# Altium PCB miaow-foc-board.pcbdoc (part 4 of 10)
Units mil, origin at the board's own origin, x right, y up, seen from the top; angles counter-clockwise.
Board outline 2755.91 x 3149.61 mil, 6 copper layers (SIG1, GND2, SIG3, PWR4, GND5, SIG6), stack 60.566 mil thick; 437 components, 392 nets, 2120 pads, 1697 vias.
Unrouted connection lines stored in the file: 1090.
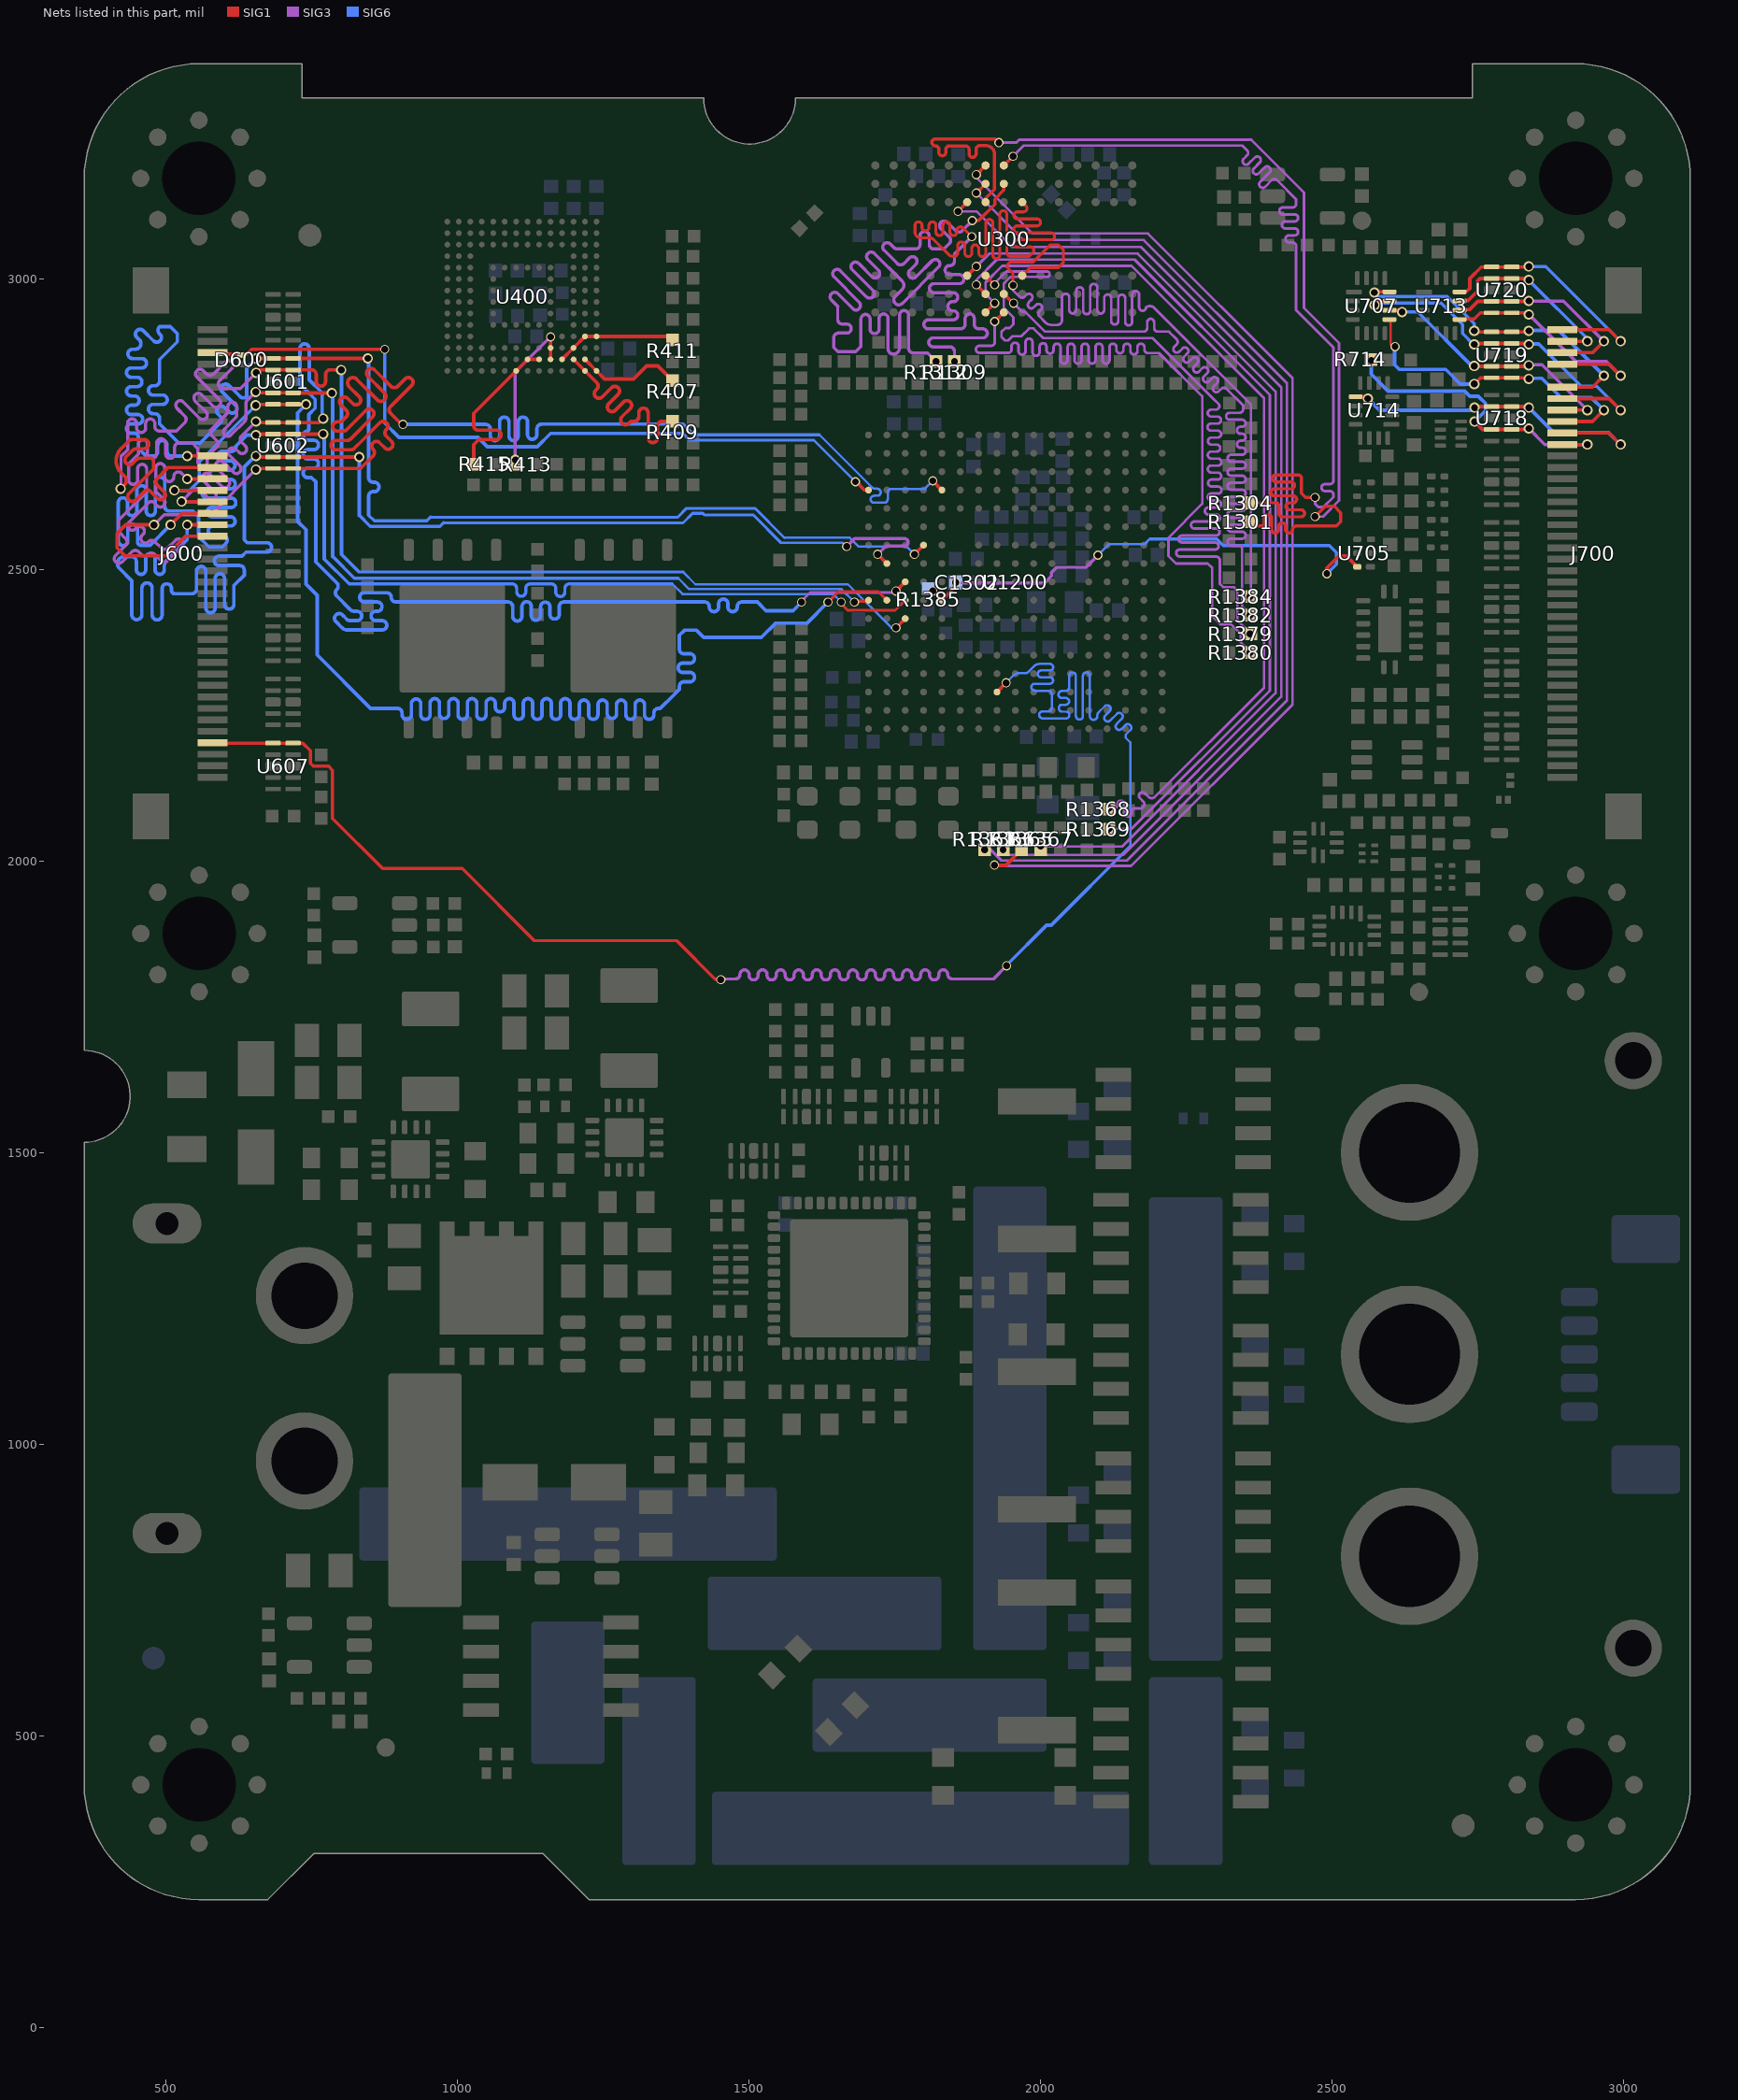
[diagram p7: the nets of this part, all layers, seen from the top]

## Via types
v1: diameter 17.72, hole 11.81, SIG1 to SIG6, tented both sides, 1223 vias
v2: diameter 15.75, hole 11.81, SIG1 to SIG6, tented both sides, 453 vias
v3: diameter 17.72, hole 11.81, SIG1 to SIG6, tented top, 21 vias

## Nets (pads, with @x,y where several pads share a name; then routed paths per layer and width w, separated by ;. In a path a pad name is that pad's centre, name@x,y a point inside that pad or via, vN(x,y) a via of type N, cw(c..) or ccw(c..) an arc to the next point about the centre after c; other vN are vias at no path point) (continued)
_30: J700.30 R714.1 U718.2 U718.9 | length 533.6
  SIG1 w6: v1@2748.41,2754.58 2748.41,2751.21 2758.43,2741.19 U718.9@2774.38,2741.19 U718.2@2808.83,2741.19 2836.41,2741.19 v1(2838.16,2742.94) ; J700.30@2895.49,2715.39 v1@2938.59,2715.39
  SIG3 w5.5: v1(2838.16,2742.94) 2865.72,2715.38 v1(2938.59,2715.38)
  SIG6 w6: v2@2567.71,2860.8 2567.71,2836.2 2596.8,2807.11 2728.3,2807.11 2737.02,2798.39 2751.44,2798.39 2763.81,2786.02 2763.81,2773.34 v1(2745.04,2754.58)
  other v2: 2567.71,2859.8
_31: J700.31 U714.9 U718.4 U718.7 | length 599.8
  SIG1 w6: U714.9@2541,2797.3 2558.95,2797.3 v1(2561.99,2794.26) ; v1@2746.79,2780.56 U718.7@2774.38,2780.56 U718.4@2808.83,2780.56 2836.41,2780.56 v1(2838.16,2778.82) ; J700.31@2895.33,2735.21 2975.69,2735.21 v1(2995.53,2715.38)
  SIG6 w6: v1(2561.99,2794.26) 2582.21,2774.04 2740.26,2774.04 v1(2745.04,2778.82) ; v1(2838.16,2778.82) 2881.36,2735.62 2975.1,2735.62 2995.34,2715.38 v1(2995.53,2715.38)
_32: J700.32 U707.9 U719.1 U719.10 | length 562.3
  SIG1 w4: U707.9@2599.07,2930.01 2601.07,2928.01 2601.07,2887.13 2604.47,2883.73 2604.59,2883.86 v2@2607.48,2883.86
  SIG1 w6: v1(2744.57,2819.25) 2755.21,2829.89 U719.10@2774.38,2829.89 U719.1@2808.83,2829.89 2836.41,2829.89 v1(2838.16,2828.14) ; J700.32@2895.33,2754.9 2947.53,2754.9 v1(2967.06,2774.43)
  SIG6 w6: v2@2607.77,2882.49 2607.77,2852.43 2615.98,2844.22 2695.53,2844.22 2720.49,2819.25 v1(2744.57,2819.25) ; v1@2838.16,2829.14 2860.46,2829.14 2893.7,2795.9 2945.59,2795.9 v1(2967.06,2774.43)
  other v2: 2608.77,2883.42
_33: J700.33 U707.10 U719.2 U719.9 | length 456.2
  SIG1 w6: U707.10@2599.07,2945.76 2617.9,2945.76 2620.7,2942.97 v1(2620.7,2942.76) ; v1@2744.69,2849.61 U719.9@2774.34,2849.61 ; U719.9@2774.38,2849.57 U719.2@2808.83,2849.57 2836.41,2849.57 v1(2838.16,2851.32) ; J700.33@2895.49,2774.44 v1(2938.59,2774.43)
  SIG3 w5.5: v1@2838.16,2852.32 2860.71,2852.32 v1(2938.59,2774.43)
  SIG6 w6: v1(2620.7,2942.76) 2620.7,2942.97 2647.67,2942.97 2741.03,2849.61 v1@2745.04,2849.61
  other v1: 2744.57,2850.11
_34: J700.34 U707.11 U719.4 U719.7 | length 646.8
  SIG1 w6: v1(2573.55,2954.89) 2580.16,2961.51 U707.11@2599.07,2961.51 ; v1(2744.57,2887.2) 2746.32,2888.94 U719.7@2774.38,2888.94 U719.4@2808.83,2888.94 2836.41,2888.94 v1(2838.16,2887.2) ; J700.34@2895.33,2794.27 2975.69,2794.27 v1(2995.53,2774.43)
  SIG6 w5.5: v1(2573.55,2954.89) 2576.77,2958.11 2687.56,2958.11 2724.52,2921.15 2724.52,2905.92 2743.25,2887.2 v1(2744.57,2887.2)
  SIG6 w6: v1@2838.16,2888.2 2855.23,2888.2 2928.08,2815.35 2954.7,2815.35 v1@2995.53,2774.52
_35: J700.35 U707.12 U719.5 U719.6 | length 565.7
  SIG1 w6: v1(2573.07,2976.21) 2574.11,2977.25 U707.12@2599.07,2977.25 ; v1@2746.79,2908.63 U719.6@2774.38,2908.63 U719.5@2808.83,2908.63 2836.41,2908.63 v1(2838.16,2910.38) ; J700.35@2895.33,2813.95 2947.53,2813.95 v1(2967.06,2833.49)
  SIG6 w5.5: v1(2573.07,2976.21) 2579.72,2969.56 2698.13,2969.56 2744.57,2923.11 v1(2744.57,2910.38)
  SIG6 w6: v1@2838.16,2911.38 2889.17,2911.38 v1(2967.06,2833.49)
_37: J700.37 U713.9 U720.1 U720.10 | length 433.6
  SIG1 w6: U713.9@2719.37,2930.01 2720.37,2931.01 2744.7,2931.01 2754.96,2941.27 U720.10@2774.38,2941.27 U720.1@2808.83,2941.27 2836.01,2941.27 v1@2838.16,2939.12 ; J700.37@2895.33,2853.32 2975.69,2853.32 v1(2995.53,2833.49)
  SIG3 w5.5: v1(2838.16,2938.52) 2918.38,2858.3 2970.71,2858.3 v1(2995.53,2833.49)
_38: J700.38 U713.10 U720.2 U720.9 | length 362.8
  SIG1 w6: U713.10@2719.37,2945.76 2720.37,2946.76 2736.24,2946.76 2750.44,2960.95 U720.9@2774.38,2960.95 U720.2@2808.83,2960.95 2836.01,2960.95 2836.75,2961.7 v1(2838.16,2961.7) ; J700.38@2895.33,2873.01 2947.53,2873.01 v1(2967.06,2892.54)
  SIG3 w5.5: v1(2838.16,2961.7) 2897.9,2961.7 v1(2967.06,2892.54)
_39: J700.39 U713.11 U720.4 U720.7 | length 335.7
  SIG1 w6: U713.11@2719.37,2961.51 2720.37,2962.51 2733.98,2962.51 2750.14,2978.67 2750.14,2996.09 2754.38,3000.32 U720.7@2774.38,3000.32 U720.4@2808.83,3000.32 2836.01,3000.32 v1@2838.16,2998.17 ; J700.39@2895.49,2892.55 v1(2938.59,2892.54)
  SIG6 w6: v1(2838.16,2997.58) 2938.59,2897.15 v1(2938.59,2892.54)
_40: J700.40 U713.12 U720.5 U720.6 | length 465.7
  SIG1 w6: U713.12@2719.37,2977.25 2720.37,2978.25 2731.84,2978.25 2736.77,2983.19 2736.77,3000.21 2756.57,3020.01 U720.6@2774.38,3020.01 U720.5@2808.83,3020.01 2836.01,3020.01 2836.75,3020.76 v1(2838.16,3020.76) ; J700.40@2895.33,2912.38 2975.69,2912.38 v1(2995.53,2892.54)
  SIG6 w6: v1(2838.16,3020.76) 2867.32,3020.76 v1(2995.53,2892.54)
_D3: R407.2 U400.A1 U400.B2 | length 183.5
  SIG1 w6: U400.B2@1218.62,2861.5 U400.A1@1238.3,2841.82 1252.27,2827.85 1301.83,2827.85 1324.33,2850.36 1343.47,2850.36 R407.2@1368.5,2825.33
_D4: R409.2 U400.A2 U400.B3 | length 455.2
  SIG1 w6: U400.B3@1199.68,2860.74 1225.42,2834.99 1238.85,2821.56 cw(c1233.2,2815.9) 1238.85,2810.24 1237.03,2808.42 ccw(c1242.69,2802.76) 1237.03,2797.11 ccw(c1242.69,2802.76) 1248.35,2797.11 1264.2,2812.96 cw(c1269.86,2807.31) 1275.51,2801.65 1259.28,2785.42 ccw(c1264.95,2779.77) 1270.6,2774.11 1284.94,2788.45 cw(c1290.61,2782.8) 1296.26,2777.14 1282.34,2763.23 ccw(c1288.05,2757.52) 1294.66,2752.87 cw(c1300.24,2747.29) 1299.98,2755.18 cw(c1300.24,2747.29) 1300.24,2755.18 1302.98,2755.18 ccw(c1302.98,2763.18) 1310.98,2763.18 1310.98,2769.84 cw(c1318.98,2769.84) 1326.98,2769.84 1326.98,2726.69 ccw(c1334.98,2726.69) 1342.98,2726.69 1342.98,2747.18 cw(c1350.98,2747.18) 1350.98,2755.18 R409.2@1368.36,2755.18
_D5: R411.2 U400.B4 U400.C3 U400.D1 U400.D2 | length 207.3
  SIG1 w6: U400.B4@1179.25,2861.5 U400.C3@1198.93,2881.19 U400.D2@1218.62,2900.87 1364.22,2900.87 R411.2@1368.5,2896.6
_D6: R413.2 U400.B5 U400.C5 | length 275.2
  SIG1 w5.5: v2@1159.56,2899.97 v2(1159.72,2900.13)
  SIG1 w6: U400.B5@1159.56,2861.5 U400.C5@1159.56,2881.19 v2@1159.56,2899.97
  SIG3 w5.5: v1(1099.21,2689.05) 1098.77,2689.49 1098.77,2839.18 v2(1159.72,2900.13)
_D7: R415.2 U400.A8 U400.B6 U400.B7 | length 316.1
  SIG1 w6: R415.2@1027.58,2681.61 1027.58,2715.18 1036.48,2724.08 1066.4,2724.08 ccw(c1066.4,2732.08) 1066.4,2740.08 1035.58,2740.08 cw(c1035.58,2748.08) 1027.58,2748.08 1027.58,2768.89 U400.A8@1100.51,2841.82 U400.B7@1120.19,2861.5 U400.B6@1139.88,2861.5
A0: R1363.2 U300.G8 | length 1874.6
  SIG1 w6: v2(1890.13,3146.94) U300.G8@1905.88,3162.69
  SIG3 w4.5: v2(1890.13,3146.94) 1970.83,3066.24 2177.48,3066.24 2422.98,2820.74 2422.98,2276.2 2148.56,2001.78 1933.16,2001.78 1914.82,2020.13 v1(1904.42,2020.13)
A1: R1365.2 U300.G9 | length 1959.8
  SIG1 w6: v2(1890.13,3178.43) U300.G9@1905.88,3194.18 ; v2@1919.88,1994.12 1924.69,1994.12 1925.68,1993.13 1940.69,1993.13 R1365.2@1967.68,2020.13
  SIG3 w4.5: v2(1890.13,3178.43) 1890.13,3173.71 1986.37,3077.47 2184.65,3077.47 2432.61,2829.51 2432.61,2269.37 2155.63,1992.39 1926.42,1992.39 1925.68,1993.13 1924.69,1994.12 v2@1919.88,1994.12
  other v2: 1921.33,1993.94
A2: R1366.2 U300.F7 | length 1826.3
  SIG1 w6: v2(1858.64,3115.44) U300.F7@1874.38,3131.19
  SIG3 w4.5: v2(1858.64,3115.44) 1890.46,3115.44 1951.66,3054.24 2173.01,3054.24 2413.34,2813.9 2413.34,2282.81 2141.92,2011.38 1944.79,2011.38 v1(1936.05,2020.13)
A3: R1367.2 U300.F3 | length 1662.5
  SIG1 w5.5: v2@1893.37,3024.19 v2@1893.86,3024.19
  SIG1 w6: U300.F3@1874.38,3005.21 v2(1890.13,3020.95)
  SIG3 w4.5: v2@1893.86,3024.19 1894.03,3024.36 1894.03,3024.73 1912.31,3043.01 2166.86,3043.01 2403.71,2806.16 2403.71,2289 2140.56,2025.85 v1@2006.04,2025.85
  other v1: 2000.32,2026.63
A4: R1368.2 U300.G1 | length 1566.7
  SIG1 w6: U300.G1@1905.88,2942.21 v2(1921.63,2957.96)
  SIG3 w4.5: v2(1921.63,2957.96) 1905.88,2973.71 1905.88,2993.51 1934.35,3021.98 2156.69,3021.98 2383.73,2794.94 2383.73,2298.06 2196.78,2111.1 cw(c2191.08,2116.8) 2185.38,2111.1 2179.34,2117.13 ccw(c2175.1,2112.89) 2170.86,2117.13 ccw(c2175.1,2112.89) 2170.86,2108.65 2176.89,2102.61 cw(c2172.65,2098.37) 2176.89,2094.13 2174.06,2091.3 2162.45,2091.3 ccw(c2162.45,2085.3) 2156.45,2085.3 2156.45,2083.28 cw(c2150.45,2083.28) 2144.45,2083.28 2144.45,2098.44 ccw(c2138.45,2098.44) 2132.45,2098.44 2132.45,2097.3 cw(c2126.45,2097.3) 2126.45,2091.3 v1(2117.49,2091.3)
A5: R1369.2 U300.G2 | length 1527.7
  SIG1 w5.5: U300.G2@1905.88,2972.59 U300.G2@1905.88,2973.71
  SIG1 w6: v2(1890.13,2989.46) U300.G2@1905.88,2973.71
  SIG3 w4.5: v2(1890.13,2989.46) 1890.13,2997.61 1925.32,3032.8 2161.64,3032.8 2393.69,2800.74 2393.69,2293.14 2156.8,2056.25 v1(2117.49,2056.25)
A6: R1379.2 U300.G3 | length 1834.4
  SIG1 w6: U300.G3@1905.88,3005.21 v2(1921.63,2989.46)
  SIG3 w4.5: v2(1921.63,2989.46) 1921.63,2992.29 1941.51,3012.17 2011.61,3012.17 cw(c2011.61,3007.94) 2015.75,3007.08 cw(c2011.76,3007.08) 2011.76,3003.1 1949.08,3003.1 1948.01,3002.03 1947.49,3002.03 1939.51,2994.05 1939.51,2993.52 1937.22,2991.24 1937.22,2950.02 1953.52,2933.72 1953.52,2921.55 1947.48,2915.51 1940.22,2915.51 1933.31,2908.6 1933.31,2899.9 1939.1,2894.11 1945.07,2894.11 1952.23,2901.27 1967.4,2901.27 1980.86,2914.73 1988.11,2914.73 2004.72,2898.13 2192.85,2898.13 2298.68,2792.3 2305.44,2785.54 cw(c2301.2,2781.3) 2301.2,2775.3 2293.21,2775.3 ccw(c2293.21,2769.3) 2293.21,2763.3 2304.11,2763.3 cw(c2304.11,2757.3) 2304.11,2751.3 2292.88,2751.3 ccw(c2292.88,2745.3) 2292.88,2739.3 2304.28,2739.3 cw(c2304.28,2733.3) 2304.28,2727.3 2293.54,2727.3 ccw(c2293.54,2721.3) 2293.54,2715.3 2302.56,2715.3 cw(c2302.56,2709.3) 2302.56,2703.3 2293.31,2703.3 ccw(c2293.31,2697.3) 2293.31,2691.3 2304.77,2691.3 cw(c2304.77,2685.3) 2304.77,2679.3 2293.33,2679.3 ccw(c2293.33,2673.3) 2293.33,2667.3 2304.28,2667.3 cw(c2304.28,2661.3) 2304.28,2655.3 2293.85,2655.3 ccw(c2293.85,2649.3) 2293.85,2643.3 2304.93,2643.3 cw(c2304.93,2637.3) 2304.93,2631.3 2293.31,2631.3 ccw(c2293.31,2625.3) 2293.31,2619.3 2304.11,2619.3 cw(c2304.11,2613.3) 2304.11,2607.3 2288.35,2607.3 ccw(c2288.35,2601.3) 2288.35,2595.3 2302.22,2595.3 cw(c2302.22,2589.3) 2302.22,2583.3 2264.46,2583.3 ccw(c2264.46,2577.3) 2264.46,2571.3 2301.53,2571.3 cw(c2301.53,2565.3) 2301.53,2559.3 2243.15,2559.3 ccw(c2243.15,2553.3) 2243.15,2547.3 2300.01,2547.3 cw(c2300.01,2541.3) 2300.01,2535.3 2239.13,2535.3 ccw(c2239.13,2529.3) 2239.13,2523.3 2301.18,2523.3 cw(c2301.18,2516.25) 2308.23,2516.25 2308.23,2476.42 2313.78,2470.87 2331.74,2470.87 2337.94,2464.67 2337.94,2414.06 v2@2361.46,2390.55
  other v2: 2359.96,2390.55
A7: R1380.2 U300.H1 | length 1493.5
  SIG1 w6: v2(1921.63,2926.47) U300.H1@1937.38,2942.21
  SIG3 w4.5: v2(1921.63,2926.47) v2(1921.63,2926.47) 1921.68,2889.84 ; 1921.75,2890.76 cw(c1915.75,2890.76) 1915.75,2884.76 1895.4,2884.76 ccw(c1895.4,2878.73) 1895.4,2872.69 1944.92,2872.69 ccw(c1944.92,2878.38) 1950.61,2878.38 1950.61,2884.11 cw(c1956.61,2884.11) 1962.61,2884.11 1962.61,2875.63 ccw(c1968.61,2875.63) 1974.61,2875.63 1974.61,2891.1 cw(c1980.61,2891.1) 1986.61,2891.1 1986.61,2873.63 ccw(c1992.61,2873.63) 1998.61,2873.63 1998.61,2883.24 cw(c2004.61,2883.24) 2010.61,2883.24 2010.61,2877.32 ccw(c2016.61,2877.32) 2022.61,2877.32 2022.61,2882.35 cw(c2028.61,2882.35) 2034.61,2882.35 2034.61,2860.24 ccw(c2040.61,2860.24) 2046.61,2860.24 2046.61,2882.35 cw(c2052.61,2882.35) 2058.61,2882.35 2058.61,2860.24 ccw(c2064.61,2860.24) 2070.61,2860.24 2070.61,2882.35 cw(c2076.61,2882.35) 2082.61,2882.35 2082.61,2860.24 ccw(c2088.61,2860.24) 2094.61,2860.24 2094.61,2882.35 cw(c2100.61,2882.35) 2106.61,2882.35 2106.61,2860.24 ccw(c2112.61,2860.24) 2118.61,2860.24 2118.61,2882.35 cw(c2124.61,2882.35) 2130.61,2882.35 2130.61,2877.83 ccw(c2136.61,2877.83) 2142.61,2877.83 2142.61,2882.35 cw(c2148.61,2882.35) 2154.61,2882.35 2154.61,2876.09 ccw(c2160.61,2876.09) 2166.61,2876.09 2166.61,2882.35 cw(c2172.61,2882.35) 2178.61,2882.35 2178.61,2878.38 ccw(c2184.61,2878.38) 2184.61,2872.38 2203.45,2872.38 2277.83,2798 2277.83,2613.59 2219.71,2555.46 2219.71,2524.31 2232.81,2511.21 2287.39,2511.21 2294.83,2503.78 2294.83,2421.5 2309.32,2407.01 2327.47,2407.01 2344.1,2390.38 2344.1,2375.78 v2@2361.93,2357.95
  other v2: 2359.96,2358.42
A8: R1382.2 U300.H2 | length 1624.3
  SIG1 w5.5: v2@1953.12,2957.97 v2(1954.18,2957.97)
  SIG1 w6: U300.H2@1937.38,2973.71 v2@1953.12,2957.97
  SIG3 w4.5: v2(1954.18,2957.97) 1968.59,2943.55 1973.54,2943.55 2007.94,2909.15 2177.26,2909.15 ccw(c2177.26,2915.15) 2183.26,2915.15 2183.26,2925.08 cw(c2189.26,2925.08) 2195.26,2925.08 2195.26,2915.15 ccw(c2201.26,2915.15) 2201.26,2909.15 2220.64,2909.15 2233.97,2895.83 cw(c2229.73,2891.58) 2233.97,2887.34 ; v2@2361.94,2421.48 2346.08,2437.34 2346.08,2537.71 ccw(c2341.89,2537.71) 2341.89,2541.89 2327.24,2541.89 cw(c2327.24,2547.89) 2327.24,2553.89 2346.26,2553.89 ccw(c2346.26,2559.89) 2346.26,2565.89 2327.24,2565.89 cw(c2327.24,2571.89) 2327.24,2577.89 2346.26,2577.89 ccw(c2346.26,2583.89) 2346.26,2589.89 2327.24,2589.89 cw(c2327.24,2595.89) 2327.24,2601.89 2346.26,2601.89 ccw(c2346.26,2607.89) 2346.26,2613.89 2327.24,2613.89 cw(c2327.24,2619.89) 2327.24,2625.89 2346.26,2625.89 ccw(c2346.26,2631.89) 2346.26,2637.89 2327.24,2637.89 cw(c2327.24,2643.89) 2327.24,2649.89 2346.26,2649.89 ccw(c2346.26,2655.89) 2346.26,2661.89 2327.24,2661.89 cw(c2327.24,2667.89) 2327.24,2673.89 2346.26,2673.89 ccw(c2346.26,2679.89) 2346.26,2685.89 2327.24,2685.89 cw(c2327.24,2691.89) 2327.24,2697.89 2346.26,2697.89 ccw(c2346.26,2703.89) 2346.26,2709.89 2343.33,2709.89 cw(c2343.33,2715.89) 2343.33,2721.89 2346.26,2721.89 ccw(c2346.26,2727.89) 2346.26,2733.89 2343.33,2733.89 cw(c2343.33,2739.89) 2343.33,2745.89 2346.26,2745.89 ccw(c2346.26,2751.89) 2346.26,2757.89 2324.73,2757.89 cw(c2324.73,2763.89) 2324.73,2769.89 2341.89,2769.89 ccw(c2341.89,2775.89) 2347.89,2775.89 2347.89,2782.49 2319.41,2810.97 ccw(c2314.87,2806.44) 2310.34,2810.97 2306.27,2806.9 cw(c2302.02,2811.15) 2297.78,2815.39 ; 2229.9,2883.27 ccw(c2234.14,2879.03) 2238.38,2874.79 ; 2229.9,2883.27 2233.97,2887.34 ; 2229.9,2883.27 2233.97,2887.34 ; 2238.38,2874.78 2243.86,2880.26 ; 2238.38,2874.78 2243.86,2880.26 ; 2243.86,2880.26 cw(c2248.1,2876.02) 2252.34,2871.77 ; 2243.86,2880.26 cw(c2248.1,2876.02) 2252.34,2871.77 ; 2246.87,2866.3 ccw(c2251.11,2862.06) 2255.35,2857.81 ; 2246.87,2866.3 2252.34,2871.77 ; 2246.87,2866.3 2252.34,2871.77 ; 2255.35,2857.81 2260.83,2863.29 ; 2255.35,2857.81 2260.83,2863.29 ; 2260.83,2863.29 cw(c2265.07,2859.05) 2269.31,2854.8 ; 2260.83,2863.29 cw(c2265.07,2859.05) 2269.31,2854.8 ; 2264.31,2849.8 ccw(c2269.03,2845.09) 2264.31,2840.37 ccw(c2268.08,2844.14) 2271.85,2840.37 ; 2264.31,2849.8 2269.31,2854.8 ; 2264.31,2849.8 2269.31,2854.8 ; 2271.85,2840.37 2277.8,2846.32 ; 2271.85,2840.37 2277.8,2846.32 ; 2277.8,2846.32 cw(c2282.04,2842.07) 2286.28,2837.83 ; 2277.8,2846.32 cw(c2282.04,2842.07) 2286.28,2837.83 ; 2280.81,2832.36 ccw(c2285.05,2828.12) 2289.29,2823.87 ; 2280.81,2832.36 2286.28,2837.83 ; 2280.81,2832.36 2286.28,2837.83 ; 2289.29,2823.87 2294.77,2829.35 ; 2289.29,2823.87 2294.77,2829.35 ; 2294.77,2829.35 cw(c2299.01,2825.1) 2303.25,2820.86 ; 2294.77,2829.35 cw(c2299.01,2825.1) 2303.25,2820.86 ; 2297.78,2815.39 2303.25,2820.86 ; 2297.78,2815.39 2303.25,2820.86
  other v2: 2359.96,2422.67
A9: R1384.2 U300.J3 | length 1640.9
  SIG1 w5: v2(1953.13,2988.41) 1953.13,3009.03 1943.26,3018.89 1943.26,3023.63 1948.34,3028.71 1987.78,3028.71 2016.89,3057.82 2031.44,3057.82 2039.16,3050.09 2039.16,3026.92 2031.32,3019.08 1982.75,3019.08 U300.J3@1968.87,3005.21
  SIG3 w4.5: v2@1953.13,2984.91 1953.13,2980.39 1964.41,2969.11 ccw(c1968.65,2973.35) 1972.89,2969.11 1976.13,2972.34 cw(c1980.37,2968.1) 1984.62,2972.34 cw(c1980.37,2968.1) 1984.62,2963.86 1980.42,2959.66 ccw(c1984.93,2955.15) 1980.42,2950.64 ccw(c1984.4,2954.62) 1988.37,2950.64 1992.56,2954.83 cw(c1996.8,2950.58) 2001.04,2954.83 cw(c1996.8,2950.58) 2001.04,2946.34 1998.35,2943.65 ccw(c2002.59,2939.41) 1998.35,2935.16 2008.25,2925.26 ccw(c2019.62,2936.63) 2019.62,2920.56 2028.63,2920.56 ccw(c2028.63,2929.09) 2037.16,2929.09 2037.16,2967.91 cw(c2043.35,2967.88) 2049.54,2967.91 2049.54,2946.31 ccw(c2055.54,2946.31) 2061.54,2946.31 2061.54,2979.22 cw(c2067.54,2979.22) 2073.54,2979.22 2073.54,2945.06 ccw(c2079.54,2945.06) 2085.54,2945.06 2085.54,2985.06 cw(c2091.54,2985.06) 2097.54,2985.06 2097.54,2946.15 ccw(c2103.54,2946.15) 2109.54,2946.15 2109.54,2966.92 cw(c2115.54,2966.92) 2121.54,2966.92 2121.54,2927.39 ccw(c2127.54,2927.39) 2133.54,2927.39 2133.54,2966.47 cw(c2139.54,2966.47) 2145.54,2966.47 2145.54,2925.81 ccw(c2151.54,2925.81) 2157.54,2925.81 2157.54,2972.54 cw(c2163.54,2972.54) 2169.54,2972.54 2169.54,2950.84 ccw(c2175.54,2950.84) 2181.54,2950.84 cw(c2187.94,2942.92) 2195.13,2950.14 2361.46,2783.82 v2@2361.46,2454.8
  other v2: 2359.96,2454.8
A10: R1301.2 U300.G7 | length 1854.8
  SIG1 w5.5: U300.G7@1905.88,3131.19 1905.88,3137.56 1921.16,3152.85 1921.16,3213.88 ccw(c1906.9,3213.88) 1914.3,3226.07 ccw(c1906.9,3213.88) 1906.9,3228.14 1895.89,3228.14 ccw(c1895.89,3221.86) 1891.23,3226.07 ccw(c1895.89,3221.86) 1889.61,3221.86 1889.61,3214.09 cw(c1883.61,3214.09) 1877.61,3214.09 1877.61,3221.86 ccw(c1871.61,3221.86) 1871.61,3227.86 1843.79,3227.86 ccw(c1843.79,3221.86) 1837.79,3221.86 1837.79,3216.88 cw(c1831.79,3216.88) 1825.79,3216.88 1825.79,3221.86 ccw(c1819.79,3221.86) 1819.79,3227.86 cw(c1819.77,3233.71) 1819.92,3239.55 1922.68,3239.55 v2(1928.83,3233.4) ; R1301.2@2361.46,2583.31 2369.2,2575.57 2378.92,2575.57 ccw(c2378.92,2581.57) 2384.92,2581.57 2384.92,2588.88 cw(c2390.92,2588.88) 2396.92,2588.88 2396.92,2569.46 ccw(c2402.92,2569.46) 2408.92,2569.46 2408.92,2574.94 cw(c2414.92,2574.94) 2420.92,2574.94 2420.92,2569.46 ccw(c2426.92,2569.46) 2432.92,2569.46 2432.92,2569.57 cw(c2438.92,2569.57) 2438.92,2575.57 2508.35,2575.57 2515.41,2582.63 2515.41,2598.48 2504.61,2609.28 2488.9,2609.28 v2(2471.38,2591.75)
  SIG3 w4.5: v2(1928.83,3233.4) 1958.8,3233.4 1963.73,3238.34 2362.01,3238.34 2452.46,3147.88 2452.46,2949.72 2512.66,2889.52 2512.66,2619.18 2485.24,2591.75 v2(2471.38,2591.75)
A11: R1304.2 U300.H9 | length 1865.6
  SIG1 w5.5: R1304.2@2361.46,2615.44 2403.35,2615.44 cw(c2403.35,2609.44) 2409.35,2609.44 2409.35,2597.44 ccw(c2415.35,2597.44) 2415.35,2591.44 2447.34,2591.44 ccw(c2447.34,2597.44) 2447.34,2603.44 2427.35,2603.44 cw(c2427.35,2609.44) 2427.35,2615.44 2433.68,2615.44 ccw(c2433.68,2621.44) 2433.68,2627.44 2401.7,2627.44 cw(c2401.7,2633.44) 2401.7,2639.44 2430.21,2639.44 ccw(c2430.21,2645.44) 2436.21,2645.44 ccw(c2430.21,2645.44) 2430.21,2651.44 2404.06,2651.44 cw(c2404.06,2657.44) 2404.06,2663.44 2442.21,2663.44 cw(c2442.21,2657.44) 2448.21,2657.44 2448.21,2631.53 2455.05,2624.69 v2(2471.38,2624.69)
  SIG1 w6: U300.H9@1937.38,3194.18 v2(1953.12,3209.93)
  SIG3 w4.5: v2@1950.82,3207.63 1969.27,3226.07 1971.47,3228.28 2346.72,3228.28 2354.88,3220.12 cw(c2350.64,3215.87) 2354.88,3211.63 2348.94,3205.68 ccw(c2353.18,3201.44) 2357.42,3197.2 2368.07,3207.85 cw(c2372.32,3203.61) 2376.56,3199.36 2366.32,3189.13 ccw(c2370.56,3184.88) 2374.81,3180.64 2384.97,3190.8 cw(c2389.21,3186.56) 2393.45,3182.32 2377.29,3166.16 ccw(c2381.55,3161.93) 2385.78,3157.67 2397.31,3169.2 cw(c2401.55,3164.96) 2405.79,3169.2 2438.79,3136.2 2438.79,3128.19 cw(c2432.79,3128.19) 2432.79,3122.19 2416.2,3122.19 ccw(c2416.2,3116.19) 2416.2,3110.19 2436.23,3110.19 cw(c2436.23,3104.19) 2436.23,3098.19 2420.35,3098.19 ccw(c2420.35,3092.19) 2420.35,3086.19 2436.28,3086.19 cw(c2436.28,3080.19) 2436.28,3074.19 2426.6,3074.19 ccw(c2426.6,3068.19) 2426.6,3062.19 2432.79,3062.19 cw(c2432.79,3056.19) 2438.79,3056.19 2438.79,2946.1 2502.91,2881.99 2502.91,2653.49 cw(c2496.94,2653.49) 2496.94,2647.52 2488.41,2647.52 ccw(c2488.41,2641.52) 2488.41,2635.52 2496.94,2635.52 cw(c2496.94,2629.52) 2502.94,2629.52 2502.94,2625.28 2486.22,2608.56 2485.7,2608.04 2476.72,2608.04 2471.38,2613.38 v2(2471.38,2624.69)
B0: J600.12 U601.1 U601.10 U1200.D11 | length 2791.5
  SIG1 w6: v1@536.18,2695.84 J600.12@579.29,2695.84 ; v1(654.33,2862.73) 654.7,2863.1 U601.1@683.32,2863.1 U601.10@717.77,2863.1 844.58,2863.1 v1@845.97,2864.48 ; v2(1783.83,2527.07) U1200.D11@1799.58,2542.81
  SIG6 w4: 1560.93,2555.4 1672.88,2555.4 1687.56,2540.71 1770.19,2540.71 v2(1783.83,2527.07)
  SIG6 w5: 953.26,2590.66 1377.53,2590.66 1392.9,2606.04 1510.29,2606.04 1560.93,2555.4
  SIG6 w5.5: v1(845.97,2863.1) v1@847.22,2861.84 ; 847.22,2594.51 857.03,2584.7 947.3,2584.7 953.26,2590.66
  SIG6 w6: v1(536.03,2695.69) 509.48,2695.69 cw(c509.48,2703.69) 501.48,2703.69 501.48,2714.4 ccw(c493.48,2714.4) 485.48,2714.4 485.48,2703.69 cw(c477.48,2703.69) 477.48,2695.69 465.61,2695.69 452.45,2708.86 452.45,2726.82 ccw(c444.45,2726.82) 444.45,2734.82 439.9,2734.82 cw(c439.9,2742.82) 439.9,2750.82 451.67,2750.82 ccw(c451.67,2758.82) 451.67,2766.82 439.9,2766.82 cw(c439.9,2774.82) 439.9,2782.82 445.63,2782.82 ccw(c445.63,2790.82) 445.63,2798.82 439.9,2798.82 cw(c439.9,2806.82) 439.9,2814.82 450.25,2814.82 ccw(c450.25,2822.82) 450.25,2830.82 439.9,2830.82 cw(c439.87,2838.86) 439.9,2846.89 458.2,2846.89 ccw(c458.17,2854.91) 458.2,2862.94 442.25,2862.94 cw(c442.25,2870.94) 442.25,2878.94 446.8,2878.94 ccw(c446.8,2888.84) 456.7,2888.84 ccw(c448.7,2888.84) 454.35,2894.49 449.53,2899.32 cw(c455.19,2904.97) 460.84,2910.63 478.11,2893.36 ccw(c483.77,2899.02) 489.43,2893.36 ccw(c483.77,2899.02) 489.43,2904.68 488.29,2905.81 cw(c493.95,2911.46) 488.29,2917.12 488.78,2917.6 503.37,2917.6 507.05,2917.6 519.14,2905.52 519.14,2891.61 488.6,2861.08 488.6,2824.31 cw(c480.6,2824.31) 480.6,2816.31 477.58,2816.31 ccw(c477.58,2808.31) 477.58,2800.31 493.8,2800.31 cw(c493.8,2792.31) 493.8,2784.31 477.58,2784.31 ccw(c477.58,2776.31) 477.58,2768.31 480.6,2768.31 cw(c480.6,2760.31) 488.6,2760.31 488.6,2751.04 521.57,2718.08 558.42,2718.08 592.79,2752.45 ccw(c587.13,2758.11) 592.79,2763.77 588.87,2767.69 cw(c594.53,2773.34) 588.87,2779 cw(c594.53,2773.34) 600.18,2779 607.64,2771.55 ccw(c613.3,2777.2) 618.95,2771.55 ccw(c613.3,2777.2) 618.95,2782.86 596.23,2805.58 cw(c601.89,2811.24) 596.23,2816.9 cw(c601.89,2811.24) 607.54,2816.9 626.73,2797.71 ccw(c632.39,2803.36) 638.04,2797.71 638.24,2797.91 638.24,2846.64 v1(654.33,2862.73) ; 847.22,2594.51 847.22,2626.65 cw(c855.22,2626.65) 855.22,2634.65 857.24,2634.65 ccw(c857.24,2642.65) 857.24,2650.65 855.22,2650.65 cw(c855.22,2658.65) 847.22,2658.65 v1@847.22,2861.84
B1: J600.16 U602.1 U602.10 U1200.C9 | length 2812.9
  SIG1 w6: v1@526.83,2617.1 J600.16@579.29,2617.1 ; v1@655.74,2753.1 U602.1@683.32,2753.1 U602.10@717.77,2753.1 762.81,2753.1 v1@769.65,2759.94 ; v2(1752.34,2464.07) U1200.C9@1768.08,2479.82
  SIG3 w4.5: v2@1588.22,2445.06 1604.77,2461.6 1749.87,2461.6 v2(1752.34,2464.07)
  SIG3 w5.5: v1(526.33,2617.6) 546.63,2637.9 cw(c552.11,2632.42) 557.59,2637.9 572.48,2623 ccw(c577.96,2628.48) 583.44,2633.96 564.27,2653.13 cw(c569.77,2658.59) 575.23,2664.09 595.5,2643.82 ccw(c601.01,2649.28) 606.46,2654.78 587.04,2674.21 cw(c592.54,2679.67) 598,2685.17 615.21,2667.96 ccw(c620.71,2673.42) 626.17,2678.92 608.54,2696.54 cw(c614.04,2702.01) 619.5,2707.5 624.84,2702.16 ccw(c630.34,2707.62) 635.8,2713.12 629.51,2719.41 cw(c634.99,2724.89) 629.51,2730.37 v1(653.99,2754.85)
  SIG6 w6: v1(769.36,2759.94) 767.52,2761.77 767.52,2804.23 745.41,2826.34 745.41,2880.3 ccw(c737.47,2880.27) 729.53,2880.3 729.53,2818.98 755.46,2793.04 755.46,2777.67 744.57,2766.77 744.57,2740.26 743.03,2738.72 ccw(c743.03,2730.72) 743.03,2722.72 753.33,2722.72 cw(c753.33,2714.72) 753.33,2706.72 743.03,2706.72 ccw(c743.03,2698.72) 743.03,2690.72 753.33,2690.72 cw(c753.33,2682.72) 753.33,2674.72 743.03,2674.72 ccw(c743.03,2666.72) 743.03,2658.72 749.25,2658.72 756.61,2651.35 756.61,2514.09 792.65,2478.05 cw(c787,2472.39) 792.66,2466.74 ccw(c798.31,2461.08) 792.65,2455.43 816.02,2432.05 ccw(c822.72,2438.79) 822.72,2429.29 827.55,2429.29 cw(c827.55,2421.29) 835.55,2421.29 cw(c827.55,2421.29) 827.55,2413.29 816.15,2413.29 cw(c816.15,2422.94) 809.34,2416.11 802.45,2422.99 ccw(c796.79,2417.34) 791.14,2411.68 801.71,2401.11 ccw(c810.94,2410.37) 810.94,2397.29 870.48,2397.29 ccw(c870.48,2405.29) 870.48,2413.29 859.55,2413.29 cw(c859.55,2421.29) 859.55,2429.29 862.25,2429.29 ccw(c862.25,2437.29) 862.25,2445.29 840.04,2445.29 cw(c840.04,2453.29) 832.04,2453.29 cw(c840.04,2453.29) 840.04,2461.29 878.25,2461.29 cw(c878.25,2453.29) 886.25,2453.29 ccw(c894.25,2453.29) 894.25,2445.29 1086.48,2445.29 cw(c1086.48,2437.29) 1094.48,2437.29 1094.48,2420.76 ccw(c1102.48,2420.76) 1110.48,2420.76 1110.48,2437.81 cw(c1118.48,2437.81) 1126.48,2437.81 1126.48,2421.92 ccw(c1134.48,2421.92) 1142.48,2421.92 1142.48,2437.09 cw(c1150.48,2437.09) 1158.48,2437.09 1158.48,2424.08 ccw(c1166.48,2424.08) 1174.48,2424.08 1174.48,2437.29 cw(c1182.48,2437.29) 1182.48,2445.29 1423.91,2445.29 cw(c1423.91,2437.29) 1431.91,2437.29 1431.91,2436.62 ccw(c1439.91,2436.62) 1447.91,2436.62 1447.91,2442.29 cw(c1455.91,2442.29) 1463.91,2442.29 1463.91,2436.62 ccw(c1471.91,2436.62) 1479.91,2436.62 1479.91,2437.29 cw(c1487.91,2437.29) 1487.91,2445.29 1514.42,2445.29 1529.29,2430.42 1575.56,2430.42 v2(1590.2,2445.06)
B2: J600.19 U602.5 U602.6 U1200.E14 | length 2854.3
  SIG1 w6: v1(479.1,2577.58) 430.6,2577.58 415.48,2562.46 415.48,2538 428.83,2524.65 499.72,2524.65 533.12,2558.05 J600.19@579.29,2558.05 ; v1@655.74,2674.36 U602.5@683.32,2674.36 U602.6@717.77,2674.36 830.2,2674.36 ccw(c830.2,2682.36) 835.85,2676.7 854.99,2695.83 ccw(c849.32,2701.48) 854.98,2707.14 cw(c860.64,2712.8) 854.97,2718.45 cw(c860.65,2712.77) 866.33,2718.45 875.22,2709.55 ccw(c880.87,2715.21) 886.54,2720.86 877.64,2729.76 cw(c883.36,2735.47) 877.64,2741.19 ; 838.02,2724.12 822.6,2708.7 cw(c816.95,2714.36) 816.95,2706.36 790.92,2706.36 cw(c790.92,2714.36) 790.92,2722.36 810.32,2722.36 ccw(c810.32,2730.36) 815.97,2724.7 854.22,2762.95 ccw(c848.57,2768.61) 842.9,2774.26 809.34,2740.7 cw(c803.69,2746.36) 803.69,2738.36 793.67,2738.36 cw(c793.67,2746.36) 793.67,2754.36 800.49,2754.36 808.99,2762.86 ccw(c803.27,2768.57) 808.99,2774.29 800.09,2783.18 cw(c805.76,2788.83) 811.41,2794.5 820.05,2785.85 ccw(c825.75,2791.54) 831.41,2797.28 813.9,2814.79 cw(c820.31,2821.2) 826.73,2827.61 862.42,2791.92 ccw(c868.39,2797.95) 874.42,2803.93 846.13,2832.22 cw(c851.79,2837.87) 857.44,2843.53 885.73,2815.24 ccw(c891.39,2820.9) 897.05,2815.24 909.83,2828.02 cw(c915.49,2822.37) 921.14,2816.71 ; 838.03,2724.14 866.75,2752.85 cw(c872.37,2747.16) 878.07,2741.54 ; v2(906.16,2749.93) 906.16,2747.83 884.87,2769.12 cw(c890.53,2774.78) 884.87,2780.44 921.14,2816.71 ; v2(1815.33,2653.05) U1200.E14@1831.08,2637.3
  SIG3 w5.5: v1(479.1,2577.58) 496.77,2595.26 576.63,2595.26 v1(653.99,2672.61)
  SIG6 w4: v2(906.16,2749.93) v2@906.39,2750.16 ; 1621.17,2732.08 1711.96,2641.29 ccw(c1716.33,2645.7) 1716.33,2639.49 1720.04,2639.49 cw(c1720.04,2633.49) 1720.04,2627.49 1714.97,2627.49 ccw(c1714.97,2621.49) 1714.97,2615.49 1732.04,2615.49 ccw(c1732.04,2621.49) 1738.04,2621.49 1738.04,2633.49 cw(c1743.71,2633.49) 1743.71,2639.16 1801.44,2639.16 v2(1815.33,2653.05)
  SIG6 w5: 1405.28,2732.08 1621.17,2732.08
  SIG6 w5.5: 1387,2750.37 1405.28,2732.08
  SIG6 w6: v2(906.16,2749.93) 1048.3,2749.93 cw(c1048.3,2742.16) 1056.07,2742.16 1056.07,2730.22 ccw(c1064.07,2730.22) 1072.07,2730.22 1072.07,2754.53 cw(c1080.07,2754.53) 1088.07,2754.53 1088.07,2730.22 ccw(c1096.07,2730.22) 1104.07,2730.22 1104.07,2754.51 cw(c1112.07,2754.51) 1120.07,2754.51 1120.07,2732.4 ccw(c1128.07,2732.4) 1136.07,2732.4 1136.07,2742.16 cw(c1144.27,2742.16) 1144.27,2750.37 1387,2750.37
B3: J600.18 U602.4 U602.7 U1200.B10 | length 2788.1
  SIG1 w6: v1@536.18,2577.73 J600.18@579.29,2577.73 ; v1@655.74,2694.05 U602.4@683.32,2694.05 U602.7@717.77,2694.05 831.04,2694.05 v1@831.38,2693.7 ; v2(1720.84,2527.07) U1200.B10@1736.59,2511.32
  SIG3 w5.5: v2(1667.7,2540.59) 1681.15,2554.04 1766.81,2554.04 cw(c1766.81,2547.73) 1766.81,2541.43 1735.2,2541.43 v2(1720.84,2527.07)
  SIG6 w4: 1554.92,2547.14 1660.5,2547.14 1667.04,2540.59 v2(1667.7,2540.59)
  SIG6 w5: 976.1,2581.04 1386.89,2581.04 1403.3,2597.45 1420.68,2597.45 1423.6,2594.54 1507.52,2594.54 1554.92,2547.14
  SIG6 w5.5: 831.38,2593.75 850.25,2574.88 969.94,2574.88 976.1,2581.04
  SIG6 w6: v1(536.03,2577.58) 536.03,2552.24 500.77,2516.98 ccw(c510.34,2507.42) 496.81,2507.42 496.81,2500.68 cw(c488.81,2500.68) 480.81,2500.68 480.81,2520.43 ccw(c472.81,2520.43) 464.81,2520.43 464.81,2500.68 cw(c456.81,2500.68) 448.81,2500.68 448.81,2514.57 ccw(c440.31,2514.57) 440.31,2523.08 428.31,2523.08 ccw(c428.25,2511.2) 419.86,2502.81 440.9,2481.77 440.9,2423.6 ccw(c449.58,2423.64) 458.26,2423.6 458.26,2469.15 cw(c467.1,2469.12) 475.94,2469.15 475.94,2423.06 ccw(c484.41,2423.1) 492.88,2423.06 492.88,2468.23 cw(c501.05,2468.23) 509.21,2468.23 509.21,2464.83 ccw(c514.52,2464.83) 514.52,2459.52 544.08,2459.52 ccw(c544.08,2467.52) 552.08,2467.52 552.08,2498.34 cw(c560.08,2498.34) 568.08,2498.34 568.08,2434.89 ccw(c576.08,2434.89) 584.08,2434.89 584.08,2485.69 cw(c592.08,2485.69) 600.08,2485.69 600.08,2441.08 ccw(c608.08,2441.08) 616.08,2441.08 616.08,2473.41 633.95,2491.28 633.95,2499.72 ccw(c625.8,2499.72) 625.8,2507.88 590.46,2507.88 cw(c590.46,2515.88) 590.46,2523.88 629.92,2523.88 637.02,2530.97 672.66,2530.97 ccw(c672.66,2538.97) 672.66,2546.97 641.99,2546.97 cw(c641.99,2555.13) 633.83,2555.13 633.95,2555.25 633.95,2677.15 652.6,2695.79 v1(653.99,2695.79) ; 831.38,2593.75 v1@831.38,2693.7
  other v1: 831.38,2694.05
B4: J600.17 U602.2 U602.9 U1200.C8 | length 2786.6
  SIG1 w5: v2@1656.33,2444.06 1669.28,2431.12 1750.87,2431.12 U1200.C8@1768.08,2448.33
  SIG1 w6: v1(507.56,2577.58) 527.4,2597.42 J600.17@579.29,2597.42 ; v1@655.74,2733.42 U602.2@683.32,2733.42 U602.9@717.77,2733.42 769.28,2733.42 v1(769.36,2733.49)
  SIG6 w4: 1368.43,2476.32 1385.87,2458.88 1644.47,2458.88 v2(1658.29,2445.06)
  SIG6 w5.5: 771.23,2518.92 813.83,2476.32 1093.75,2476.32 cw(c1093.75,2468.57) 1101.5,2468.57 1101.5,2462.81 ccw(c1109.25,2462.81) 1117,2462.81 1117,2468.57 cw(c1124.64,2468.57) 1124.64,2476.2 1160.93,2476.2 cw(c1160.93,2468.57) 1168.57,2468.57 1168.57,2462.29 ccw(c1176.32,2462.29) 1184.07,2462.29 1184.07,2468.57 cw(c1191.82,2468.57) 1191.82,2476.32 1368.43,2476.32
  SIG6 w6: v1(507.56,2577.58) 472.43,2542.45 457.08,2542.45 cw(c457.08,2548.51) 451.02,2548.51 451.02,2569.81 ccw(c442.54,2569.78) 434.06,2569.81 434.06,2550.11 cw(c425.93,2550.14) 417.8,2550.12 417.8,2616.12 cw(c425.68,2616.1) 433.56,2616.12 433.56,2601.45 ccw(c441.56,2601.45) 449.56,2601.45 449.56,2636.8 cw(c457.56,2636.8) 465.56,2636.8 465.56,2601.45 ccw(c473.56,2601.45) 481.56,2601.45 481.56,2651.52 cw(c489.56,2651.52) 497.56,2651.52 497.56,2609.13 ccw(c505.44,2609.13) 505.44,2601.26 546.2,2601.26 555.62,2591.83 555.62,2557.39 573.44,2539.58 596,2539.58 602.34,2545.92 ccw(c596.68,2551.57) 596.68,2559.57 580.07,2559.57 cw(c580.07,2567.57) 580.07,2575.57 610.26,2575.57 ccw(c610.26,2583.57) 610.26,2591.57 578.17,2591.57 cw(c578.17,2599.57) 578.17,2607.57 611.47,2607.57 ccw(c611.47,2615.57) 611.47,2623.57 569.86,2623.57 cw(c569.86,2631.57) 569.86,2639.57 610.52,2639.57 ccw(c610.52,2647.57) 610.52,2655.57 581.73,2655.57 cw(c581.73,2663.57) 581.73,2671.57 610.04,2671.57 ccw(c610.04,2679.57) 610.04,2687.57 596.03,2687.57 cw(c596.03,2695.57) 596.03,2703.57 611.59,2703.57 ccw(c611.59,2711.57) 619.59,2711.57 619.59,2712.81 638.45,2731.67 v1(653.99,2731.67) ; v1(769.36,2733.49) 771.23,2731.62 771.23,2518.92
B5: J600.15 U601.5 U601.6 U1200.B8 | length 2787.5
  SIG1 w5: v2(1635.59,2445.06) 1653.68,2463.15 1721.77,2463.15 U1200.B8@1736.59,2448.33
  SIG1 w6: v1(514.16,2636.79) J600.15@579.29,2636.79 ; v1@655.38,2784.36 U601.5@682.97,2784.36 ; U601.5@683.32,2784.36 U601.6@717.77,2784.36 ; U601.6@717.87,2784.46 v1@739.73,2784.46
  SIG6 w6: v1(514.16,2636.79) 540,2636.79 556.57,2653.36 556.57,2685.55 v1(653.64,2782.61) ; v1(739.94,2784.25) 725.53,2769.84 725.53,2583.6 739.94,2569.19 739.94,2475.85 759.02,2456.77 759.02,2354.34 850.61,2262.75 896.79,2262.75 cw(c896.79,2254.75) 904.79,2254.75 904.79,2251.87 ccw(c912.79,2251.87) 920.79,2251.87 920.79,2270.87 cw(c928.79,2270.87) 936.79,2270.87 936.79,2251.87 ccw(c944.79,2251.87) 952.79,2251.87 952.79,2271.52 cw(c960.79,2271.52) 968.79,2271.52 968.79,2253.37 ccw(c976.79,2253.37) 984.79,2253.37 984.79,2271.52 cw(c992.79,2271.52) 1000.79,2271.52 1000.79,2251.87 ccw(c1008.79,2251.87) 1016.79,2251.87 1016.79,2271.52 cw(c1024.79,2271.52) 1032.79,2271.52 1032.79,2251.87 ccw(c1040.79,2251.87) 1048.79,2251.87 1048.79,2271.52 cw(c1056.79,2271.52) 1064.79,2271.52 1064.79,2264.7 ccw(c1072.79,2264.7) 1080.79,2264.7 1080.79,2271.52 cw(c1088.79,2271.52) 1096.79,2271.52 1096.79,2251.87 ccw(c1104.79,2251.87) 1112.79,2251.87 1112.79,2271.52 cw(c1120.79,2271.52) 1128.79,2271.52 1128.79,2251.87 ccw(c1136.79,2251.87) 1144.79,2251.87 1144.79,2271.52 cw(c1152.79,2271.52) 1160.79,2271.52 1160.79,2251.87 ccw(c1168.79,2251.87) 1176.79,2251.87 1176.79,2271.52 cw(c1184.79,2271.52) 1192.79,2271.52 1192.79,2251.87 ccw(c1200.79,2251.87) 1208.79,2251.87 1208.79,2269.09 cw(c1216.79,2269.09) 1224.79,2269.09 1224.79,2251.87 ccw(c1232.79,2251.87) 1240.79,2251.87 1240.79,2269.09 cw(c1248.79,2269.09) 1256.79,2269.09 1256.79,2253.34 ccw(c1264.79,2253.34) 1272.79,2253.34 1272.79,2269.09 cw(c1280.79,2269.09) 1288.79,2269.09 1288.79,2251.87 ccw(c1296.79,2251.87) 1304.79,2251.87 1304.79,2269.09 cw(c1312.79,2269.09) 1320.79,2269.09 1320.79,2251.87 ccw(c1328.79,2251.87) 1336.79,2251.87 1336.79,2254.75 cw(c1344.79,2254.75) 1344.79,2262.75 1347.79,2262.75 1370.35,2285.3 1380.57,2295.53 1380.57,2300.45 cw(c1388.57,2300.45) 1388.57,2308.45 1398.57,2308.45 ccw(c1398.57,2316.45) 1398.57,2324.45 1386.46,2324.45 cw(c1386.46,2332.45) 1386.46,2340.45 1398.57,2340.45 ccw(c1398.57,2348.45) 1398.57,2356.45 1388.57,2356.45 cw(c1388.57,2364.45) 1380.57,2364.45 1380.57,2367.45 1380.57,2388 1389.36,2396.79 1409.93,2396.79 1422.36,2384.36 1521.18,2384.36 1545.64,2408.82 1599.36,2408.82 v2(1635.59,2445.06)
B6: J600.14 U601.4 U601.7 U1200.A8 | length 2853
  SIG1 w4: U1200.A8@1703.49,2446.73 U1200.A8@1705.09,2448.33
  SIG1 w6: v1@536.18,2656.47 J600.14@579.29,2656.47 ; v1@655.38,2804.05 U601.4@682.97,2804.05 ; U601.4@683.32,2804.05 U601.7@717.77,2804.05 ; U601.7@718.77,2803.97 784.06,2803.97 v1(784.32,2803.72) ; v2(1680.98,2445.06) 1682.65,2446.73 U1200.A8@1703.49,2446.73
  SIG3 w5.5: v1(536.03,2656.32) 526.24,2666.11 ccw(c520.76,2660.63) 513.01,2660.63 513.01,2659.65 cw(c505.26,2659.65) 497.51,2659.65 497.51,2675.13 ccw(c489.76,2675.13) 482.01,2675.13 482.01,2635.05 495.7,2621.36 cw(c490.22,2615.88) 484.74,2610.4 479.28,2615.86 ccw(c474.65,2611.23) 470.03,2615.86 436.27,2582.1 ccw(c441.97,2576.39) 447.65,2570.65 449.35,2572.36 cw(c454.84,2566.88) 460.31,2561.4 458.71,2559.79 ccw(c464.24,2554.26) 469.77,2548.73 cw(c475.17,2543.37) 480.56,2548.73 491.54,2537.76 ccw(c496.99,2543.27) 502.45,2537.77 515.83,2551.16 cw(c521.32,2545.68) 526.79,2540.2 502.45,2515.85 cw(c496.99,2521.35) 491.52,2515.86 480.53,2526.85 ccw(c475.07,2521.35) 469.6,2526.85 cw(c463.45,2532.97) 457.32,2526.82 452.62,2531.51 ccw(c447.13,2526.02) 441.63,2531.51 424.19,2514.08 cw(c418.71,2519.55) 413.23,2525.04 430.9,2542.71 ccw(c425.49,2548.13) 430.9,2553.54 417.78,2566.67 417.78,2585.23 466.51,2633.96 466.51,2673.7 ccw(c458.76,2673.7) 451.01,2673.7 451.01,2654.78 cw(c443.26,2654.78) 435.51,2654.78 435.51,2682.35 452.5,2699.35 452.5,2715.89 cw(c460.25,2715.89) 468,2715.89 468,2699.35 ccw(c475.75,2699.35) 483.5,2699.35 483.5,2717.67 cw(c491.25,2717.67) 499,2717.67 499,2699.35 ccw(c506.75,2699.35) 514.5,2699.35 514.5,2710.69 cw(c522.25,2710.69) 522.25,2718.44 544.38,2718.44 554.56,2708.26 554.56,2685.06 ccw(c562.49,2685.04) 570.43,2685.06 570.43,2694.46 587.11,2711.14 ccw(c581.79,2716.46) 587.11,2721.79 577.86,2731.03 cw(c583.34,2736.52) 577.84,2741.98 602.81,2766.94 ccw(c595.48,2774.22) 605.81,2774.22 605.81,2780.31 cw(c613.56,2780.31) 621.31,2780.31 621.31,2767.57 cw(c611.54,2767.57) 618.47,2760.68 600.51,2742.72 ccw(c606,2737.25) 611.47,2731.76 634.26,2754.55 ccw(c628.03,2760.74) 636.81,2760.74 636.81,2785.76 cw(c644.56,2785.76) 639.09,2791.24 640.52,2792.67 v1(653.64,2805.79)
  SIG6 w4: 1378.52,2486.13 1397.41,2467.23 1658.81,2467.23 v2(1680.98,2445.06)
  SIG6 w5.5: 785.79,2523.27 822.93,2486.13 1378.52,2486.13
  SIG6 w6: v1(784.32,2803.72) 782.33,2801.72 782.33,2801.58 785.79,2798.12 785.79,2523.27
B7: J600.13 U601.2 U601.9 U1200.C7 | length 2854.7
  SIG1 w6: v1(421.8,2639.61) 428.44,2646.25 ccw(c420.97,2653.73) 428.44,2661.21 422.74,2666.92 cw(c443.44,2687.67) 422.69,2708.38 436.14,2721.82 cw(c441.79,2716.16) 441.79,2724.16 461.93,2724.16 cw(c461.93,2716.16) 461.93,2708.16 448.41,2708.16 ccw(c448.41,2700.16) 442.76,2705.82 431.5,2694.57 ccw(c437.17,2688.92) 442.82,2683.25 449.39,2689.82 cw(c455.04,2684.16) 455.04,2692.16 472.13,2692.16 cw(c472.13,2686.17) 478.11,2686.17 478.11,2673.29 436.36,2631.54 ccw(c442.1,2625.84) 447.8,2620.1 463.21,2635.5 cw(c467.87,2630.83) 472.54,2635.5 485.06,2622.98 ccw(c490.72,2628.63) 496.38,2634.29 483.85,2646.81 cw(c488.65,2651.61) 483.85,2656.41 503.61,2676.16 J600.13@579.29,2676.16 ; v1(654.41,2838.61) 659.22,2843.42 U601.2@683.32,2843.42 U601.9@717.77,2843.42 749.42,2843.42 cw(c749.42,2835.42) 757.42,2835.42 757.42,2823.47 ccw(c765.42,2823.47) 773.42,2823.47 773.42,2835.42 cw(c781.42,2835.42) 781.42,2843.42 v1@800.17,2843.42 ; v2(1752.34,2401.08) U1200.C7@1768.08,2416.83
  SIG3 w5.5: v1(421.8,2639.61) 422.43,2640.24 422.43,2695.15 433.86,2706.58 433.86,2751.69 cw(c441.61,2751.69) 449.36,2751.69 449.36,2743.79 ccw(c457.11,2743.79) 464.86,2743.79 464.86,2751.69 cw(c472.61,2751.69) 480.36,2751.69 480.36,2746.44 ccw(c488.11,2746.44) 488.11,2738.69 517.39,2738.69 531.9,2753.2 ccw(c526.42,2758.68) 531.9,2764.16 518.7,2777.35 cw(c524.2,2782.82) 529.66,2788.31 557.5,2760.47 ccw(c563,2765.93) 568.46,2771.43 549.86,2790.04 cw(c555.36,2795.5) 560.82,2801 580.11,2781.71 ccw(c585.61,2787.16) 591.07,2792.67 552.63,2831.1 cw(c558.16,2836.57) 563.63,2842.09 569.02,2836.7 ccw(c575.17,2842.84) 581.31,2836.7 601.61,2856.99 cw(c607.09,2851.51) 612.57,2846.03 591.58,2825.04 ccw(c597.06,2819.56) 591.58,2814.08 ccw(c598.38,2820.88) 598.38,2811.26 627.06,2811.26 v1(654.41,2838.61)
  SIG6 w4: 1386.99,2496.76 1408.19,2475.56 1669.88,2475.56 1744.36,2401.08 v2(1752.34,2401.08)
  SIG6 w5.5: 800.84,2526.99 831.07,2496.76 1386.99,2496.76
  SIG6 w6: v1(800.2,2843.39) 800.55,2843.04 800.84,2843.04 800.84,2526.99
BA0: R1309.2 U300.J7 | length 1816.4
  SIG1 w5: v2(1882.34,3071.88) 1867.12,3087.09 ccw(c1862.88,3082.85) 1856.88,3082.85 1856.88,3079.83 cw(c1850.88,3079.83) 1844.88,3079.83 1844.88,3091.51 ccw(c1838.88,3091.51) 1832.88,3091.51 1832.88,3079.83 cw(c1826.88,3079.83) 1820.88,3079.83 1820.88,3091.51 ccw(c1814.88,3091.51) 1808.88,3091.51 1808.88,3088.08 cw(c1802.88,3088.08) 1796.88,3088.08 1796.88,3091.51 ccw(c1790.88,3091.51) 1784.88,3091.51 1784.88,3079.83 ccw(c1794.63,3079.83) 1794.63,3070.08 1809.48,3070.08 cw(c1809.48,3059.14) 1817.21,3066.87 1843.33,3040.75 ccw(c1849.03,3046.44) 1849.03,3038.39 1852.36,3038.39 ccw(c1852.36,3044.39) 1858.36,3044.39 1858.36,3056.92 cw(c1864.36,3056.92) 1870.36,3056.92 1870.36,3043.89 ccw(c1876.36,3043.89) 1882.36,3043.89 1882.36,3052 cw(c1888.36,3052) 1894.36,3052 1894.36,3043.89 ccw(c1900.36,3043.89) 1906.36,3043.89 1906.36,3095.68 cw(c1912.36,3095.68) 1918.36,3095.68 1918.36,3040.49 ccw(c1924.36,3040.49) 1930.36,3040.49 1930.36,3110.61 cw(c1936.36,3110.61) 1942.36,3110.61 1942.36,3044.39 ccw(c1948.36,3044.39) 1948.36,3038.39 1980.3,3038.39 1988.88,3046.98 1988.88,3048.53 ccw(c1982.88,3048.53) 1982.88,3054.53 1960.36,3054.53 cw(c1960.36,3060.53) 1960.36,3066.53 2018.43,3066.53 ccw(c2018.43,3072.53) 2018.43,3078.53 1960.36,3078.53 cw(c1960.36,3084.53) 1960.36,3090.53 1994.39,3090.53 ccw(c1994.39,3096.53) 1994.39,3102.53 1960.36,3102.53 cw(c1960.36,3108.53) 1960.36,3114.53 1971.05,3114.53 ccw(c1971.05,3120.53) 1975.29,3124.77 U300.J7@1968.87,3131.19
  SIG3 w5.5: v2(1852.65,2857.96) 1852.65,2872.38 1852.65,2875.13 ccw(c1844.9,2875.13) 1844.9,2882.88 1816.24,2882.88 cw(c1816.24,2890.63) 1816.24,2898.38 1901.12,2898.38 ccw(c1901.12,2906.13) 1901.12,2913.88 1894.5,2913.88 cw(c1894.5,2921.89) 1886.49,2921.89 1886.49,2932.03 ccw(c1878.74,2932.07) 1870.99,2932.03 1870.99,2921.89 cw(c1862.98,2921.89) 1862.98,2913.88 1807.82,2913.88 cw(c1807.82,2921.63) 1807.82,2929.38 1850.54,2929.38 ccw(c1850.54,2937.13) 1850.54,2944.88 1849.01,2944.88 cw(c1849.01,2952.63) 1849.01,2960.38 1850.54,2960.38 ccw(c1850.54,2968.13) 1850.54,2975.88 1817.41,2975.88 cw(c1817.41,2983.63) 1817.41,2991.38 1861.02,2991.38 ccw(c1861.02,2999.13) 1861.02,3006.88 1844.26,3006.88 cw(c1844.26,3014.63) 1844.26,3022.38 1844.9,3022.38 ccw(c1844.9,3030.13) 1852.65,3030.13 1852.65,3042.19 1853.14,3042.68 v2(1882.34,3071.88)
BA1: R1312.2 U300.H8 | length 1837.5
  SIG1 w5.5: v2(1883.1,3099.66) 1894.15,3099.66 1921.84,3127.35 1921.84,3136.36 1937.38,3151.9 U300.H8@1937.38,3162.69
  SIG3 w5.5: 1652.23,2951.65 1652.23,2929.86 ccw(c1659.98,2929.86) 1659.98,2922.11 1667.69,2922.11 cw(c1667.69,2914.36) 1667.69,2906.61 1653.75,2906.61 ccw(c1653.75,2898.3) 1645.44,2898.3 1645.44,2881.74 1652.32,2874.86 1683.41,2874.86 1692.26,2883.72 1692.26,2930.85 cw(c1700.01,2930.85) 1707.76,2930.85 1707.76,2913.35 ccw(c1715.51,2913.35) 1723.26,2913.35 1723.26,2931.73 cw(c1731.01,2931.73) 1738.76,2931.73 1738.76,2879.45 ccw(c1747.76,2879.45) 1747.62,2870.46 ccw(c1747.62,2881.24) 1758.4,2881.24 1758.4,2937.49 cw(c1766.15,2937.49) 1773.9,2937.49 1773.9,2880.83 ccw(c1782.21,2880.83) 1782.21,2872.52 1806.46,2872.52 v2(1821.02,2857.96) ; 1652.75,2952.17 1641.57,2963.35 cw(c1647.05,2968.83) 1641.57,2974.31 cw(c1647.05,2968.83) 1652.53,2974.31 1678.62,2948.22 ccw(c1683.68,2953.27) 1688.74,2948.22 ccw(c1682.83,2954.12) 1688.74,2960.02 1646.01,3002.75 cw(c1651.5,3008.22) 1656.97,3013.71 1701.87,2968.81 ccw(c1707.37,2974.27) 1712.83,2979.77 1677.4,3015.2 cw(c1682.89,3020.67) 1688.36,3026.17 1711.17,3003.35 ccw(c1716.67,3008.81) 1722.13,3014.32 1704.05,3032.39 cw(c1709.55,3037.85) 1715.01,3043.35 1762.84,2995.53 cw(c1755.91,2988.6) 1762.84,2981.67 1750.94,2969.78 ccw(c1757.01,2963.65) 1763.13,2957.58 1825.21,3019.66 ccw(c1819.74,3025.19) 1814.21,3030.66 1786.8,3003.25 cw(c1781.32,3008.73) 1775.84,3014.21 1786.19,3024.56 ccw(c1780.72,3030.06) 1775.23,3035.52 1765.48,3025.77 cw(c1759.99,3031.25) 1754.51,3025.77 1752.57,3027.71 1731.72,3048.56 cw(c1737.22,3054.02) 1742.68,3059.52 1748.99,3053.21 ccw(c1754.47,3058.69) 1754.47,3050.94 1786.11,3050.94 ccw(c1786.11,3058.28) 1793.44,3058.28 1793.44,3073.18 cw(c1801.4,3073.15) 1809.36,3073.18 1809.36,3058.69 ccw(c1817.11,3058.69) 1817.11,3050.94 1834.54,3050.94 1843.78,3060.18 ccw(c1838.3,3065.66) 1843.78,3071.14 1829.35,3085.58 cw(c1834.83,3091.06) 1829.35,3096.54 cw(c1834.83,3091.06) 1840.31,3096.54 1854.74,3082.1 ccw(c1860.22,3087.58) 1865.7,3082.1 v2@1883.1,3099.5
BL: D600.1 J600.3 U1200.A14 | length 1326.1
  SIG1 w6: J600.3@579.29,2873.01 581.91,2870.39 D600.1@630.17,2870.39 ; D600.1@628.59,2868.81 D600.1@630.16,2870.38 ; v2(874.91,2878.83) 874.87,2878.88 647.08,2878.88 638.59,2870.38 D600.1@630.16,2870.38 ; v2(1682.62,2651.42) 1684.3,2651.42 1698.41,2637.3 U1200.A14@1705.09,2637.3
  SIG6 w4: 1611.23,2723.08 1682.76,2651.56 v2(1682.62,2651.42)
  SIG6 w5: 1397.95,2723.08 1611.23,2723.08
  SIG6 w5.5: 1386.4,2734.63 1397.95,2723.08
  SIG6 w6: v2(874.91,2878.83) 874.86,2878.77 874.86,2752.23 899.57,2727.51 1035.12,2727.51 1050.81,2711.82 1136.93,2711.82 1159.74,2734.63 1386.4,2734.63
BOOT0: C1302.1 R1385.2 U705.6 U1200.E8 | length 884.9
  SIG1 w6: v2(1815.33,2464.07) U1200.E8@1831.08,2448.33 1853.64,2470.89 1853.64,2482.34 v2@1854.07,2482.77 ; v2(2491.62,2493.71) 2491.62,2503.48 2512.15,2524 2525.34,2524 U705.6@2543.79,2505.55
  SIG3 w5.5: v2(1854.83,2478.76) 1855.3,2478.28 2007.62,2478.28 2019.09,2489.75 2019.09,2495.93 2027.96,2504.8 2078.03,2504.8 v2(2098.79,2525.57)
  SIG6 w4: v2(2098.79,2525.57) 2118.02,2544.79 2179.37,2544.79
  SIG6 w4.5: 2179.37,2544.79 2188.04,2553.46
  SIG6 w5.5: 2188.04,2553.46 2302.58,2553.46 2314.15,2541.89 ; 2314.15,2541.96 2495.74,2541.96 2507.81,2529.88 2507.81,2509.9 v2(2491.62,2493.71)
CLK: J600.37 U607.1 U607.10 U1200.H3 | length 3301.1
  SIG1 w5.5: U607.10@717.77,2203.1 734.34,2203.1 747.22,2190.22 747.22,2168.63 752.2,2163.65 778.48,2163.65 785.54,2156.6 785.54,2073.82 871.45,1987.91 1007.87,1987.91 1131.58,1864.2 1375.74,1864.2 1442.08,1797.85 v2@1451.7,1797.85
  SIG1 w6: J600.37@579.91,2203.1 U607.1@683.32,2203.1 U607.10@717.77,2203.1 ; U1200.H3@1925.56,2290.85 v2(1941.31,2306.59)
  SIG3 w5.5: v2@1451.7,1797.85 1452.76,1798.92 1454.69,1798.92 1455.1,1798.5 1474.1,1798.5 1476.85,1798.5 ccw(c1476.85,1806.25) 1484.6,1806.25 1484.6,1806.34 cw(c1492.35,1806.34) 1500.1,1806.34 1500.1,1804.69 ccw(c1507.85,1804.69) 1515.6,1804.69 1515.6,1806.34 cw(c1523.35,1806.34) 1531.1,1806.34 1531.1,1804.63 ccw(c1538.85,1804.63) 1546.6,1804.63 1546.6,1806.34 cw(c1554.35,1806.34) 1562.1,1806.34 1562.1,1804.63 ccw(c1569.85,1804.63) 1577.6,1804.63 1577.6,1806.34 cw(c1585.35,1806.34) 1593.1,1806.34 1593.1,1804.63 ccw(c1600.85,1804.63) 1608.6,1804.63 1608.6,1806.34 cw(c1616.35,1806.34) 1624.1,1806.34 1624.1,1804.63 ccw(c1631.85,1804.63) 1639.6,1804.63 1639.6,1806.34 cw(c1647.35,1806.34) 1655.1,1806.34 1655.1,1804.63 ccw(c1662.85,1804.63) 1670.6,1804.63 1670.6,1806.34 cw(c1678.35,1806.34) 1686.1,1806.34 1686.1,1804.63 ccw(c1693.85,1804.63) 1701.6,1804.63 1701.6,1806.34 cw(c1709.35,1806.34) 1717.1,1806.34 1717.1,1804.63 ccw(c1724.85,1804.63) 1732.6,1804.63 1732.6,1806.34 cw(c1740.35,1806.34) 1748.1,1806.34 1748.1,1804.63 ccw(c1755.85,1804.63) 1763.6,1804.63 1763.6,1806.34 cw(c1771.35,1806.34) 1779.1,1806.34 1779.1,1804.63 ccw(c1786.85,1804.63) 1794.6,1804.63 1794.6,1806.34 cw(c1802.35,1806.34) 1810.1,1806.34 1810.1,1804.63 ccw(c1817.85,1804.63) 1825.6,1804.63 1825.6,1806.34 cw(c1833.35,1806.34) 1841.1,1806.34 1841.1,1806.25 ccw(c1848.85,1806.25) 1848.85,1798.5 1859.99,1798.5 1919.4,1798.5 v2(1942,1821.1)
  SIG6 w4: v2(1941.31,2306.59) 1954.89,2320.17 cw(c1961.59,2313.47) 1961.59,2322.95 1973.95,2322.95 ccw(c1973.95,2330.98) 1979.63,2325.3 1990.08,2335.75 cw(c1997.82,2328.01) 1997.82,2338.95 2016.39,2338.95 cw(c2016.37,2333.37) 2016.39,2327.79 2001.33,2327.79 ccw(c2001.31,2321.91) 2001.33,2316.04 2016.48,2316.04 cw(c2016.48,2310.59) 2016.48,2305.14 1990.71,2305.14 ccw(c1990.71,2299.14) 1990.71,2293.14 2013.65,2293.14 cw(c2013.65,2287.14) 2019.65,2287.14 2019.65,2263.93 2019.68,2263.89 cw(c2013.44,2263.89) 2013.44,2257.65 2003.96,2257.65 ccw(c2003.96,2251.65) 2003.96,2245.65 2044.14,2245.65 ccw(c2044.15,2251.37) 2044.21,2257.09 2037.49,2257.09 cw(c2037.49,2263.09) 2037.49,2269.09 2043.61,2269.09 ccw(c2043.61,2274.81) 2043.68,2280.53 2036.96,2280.53 cw(c2036.96,2286.53) 2036.96,2292.53 2043.08,2292.53 ccw(c2043.08,2298.77) 2049.32,2298.77 2049.32,2318.35 cw(c2055.2,2318.35) 2061.08,2318.35 2061.08,2249.54 ccw(c2067.08,2249.54) 2073.08,2249.54 2073.08,2318.57 cw(c2079.08,2318.57) 2085.08,2318.57 2085.08,2249.37 ccw(c2091.34,2249.33) 2097.6,2249.37 cw(c2107.87,2249.37) 2100.61,2256.63 2110.36,2266.37 cw(c2114.6,2262.13) 2118.84,2257.89 2111.37,2250.41 ccw(c2115.61,2246.17) 2119.85,2241.93 2131.21,2253.29 cw(c2135.45,2249.04) 2139.7,2244.8 2130.88,2235.98 ccw(c2135.12,2231.74) 2139.36,2227.49 2145.82,2233.96 cw(c2150.07,2229.71) 2154.31,2225.47 2146.23,2217.39 2146.23,2212.64 2154.53,2204.34 2154.53,2026.65
  SIG6 w6: v2@1942.08,1822.16 2010.46,1890.55 2018.42,1890.55 2154.53,2026.65
  other v2: 1451.7,1797.35